# Altium PCB PCB1.PcbDoc (part 4 of 8)
Units mil, origin at the board's own origin, x right, y up, seen from the top; angles counter-clockwise.
Board outline 6000 x 4000 mil, 2 copper layers (Top Layer, Bottom Layer); 1253 components, 565 nets, 6549 pads, 0 vias.
Unrouted connection lines stored in the file: 1925.
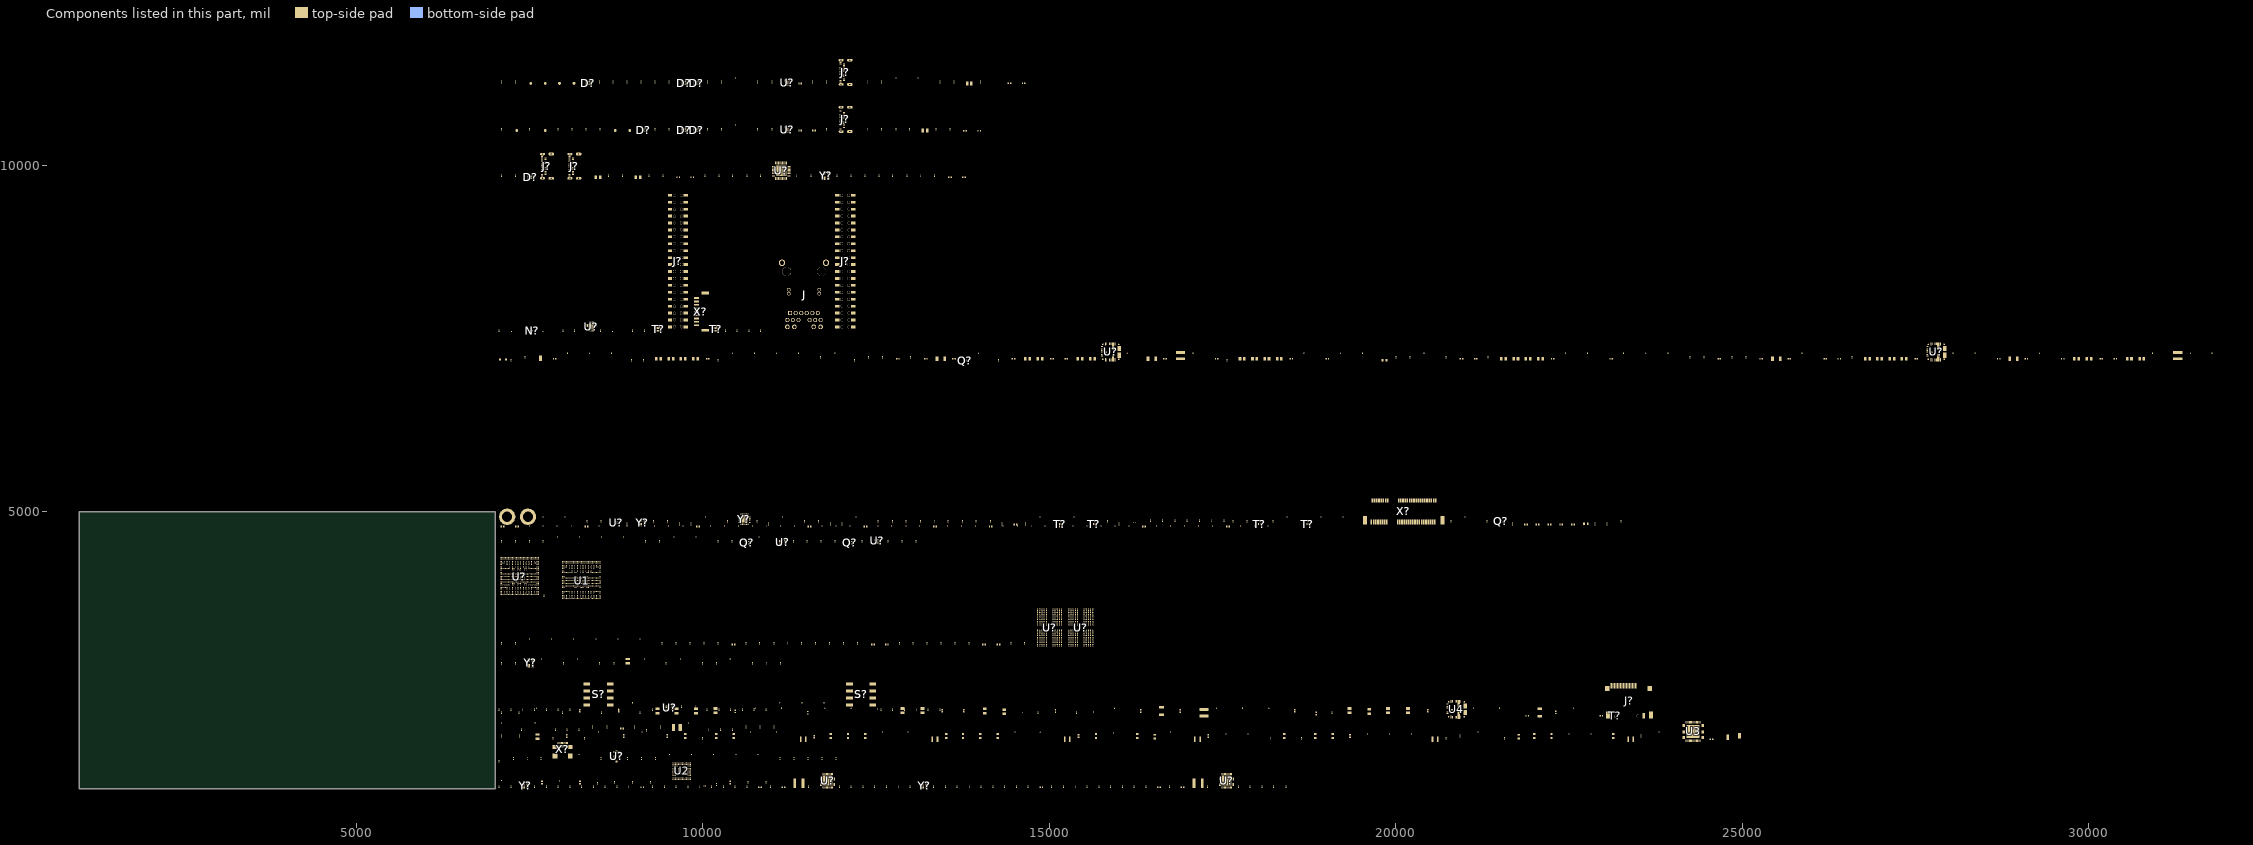
[diagram p3: the components of this part, seen from the top]

## Part data (continued)
C? C?: library part CMP-001-000292-14, "CAP", Manufacturer=Samsung, Manufacturer Part Number=GRM0335C1H470JA01D, Package=0201, Temperature characteristics=C0G, Tolerance=+/-5%, Voltage=50V, Alternative component=Allowed, ClassName=SMALL, Component Type=Capacitor, ComponentLink1Description=1_Datasheet, ComponentLink2Description="2_Product page", ComponentLink3Description=3_X-information, ComponentLink4Description=4_X-information, Creation date=20190101, HasBeenBuilt=TBD, Part Number=GRM0335C1H470JA01D, Sort order=302, Source=RLC_UN1Q.SchLib, System=RLC
C? C?: library part CMP-001-000271-14, "CAP", Manufacturer=Samsung, Manufacturer Part Number=GRM033R71E102KA01D, Package=0201, Temperature characteristics=X7R, Tolerance=+/-10%, Voltage=25V, Alternative component=Allowed, ClassName=SMALL, Component Type=Capacitor, ComponentLink1Description=1_Datasheet, ComponentLink2Description="2_Product page", ComponentLink3Description=3_X-information, ComponentLink4Description=4_X-information, Creation date=20190101, HasBeenBuilt=TBD, Part Number=GRM033R71E102KA01D, Sort order=302, System=RLC
C? C?: library part CMP-001-000419-13, "CAP_RF_MATCHING", Manufacturer=Murata, Manufacturer Part Number=GJM0335C1E100GB01D, Operating temperature range="-55 ... +125C", Package=0201, Temperature characteristics=C0G, Tolerance="+/- 2%", Voltage=25V, ClassName=SMALL, Component Type=Capacitor, ComponentLink1Description=1_Datasheet, ComponentLink2Description="2_Product page", ComponentLink3Description=3_X-information, ComponentLink4Description=4_X-information, Creation date=20200101, HasBeenBuilt=TBD, Part Number=GJM0335C1E100GB01D, Remark="RF matching, use part number", Sort order=202, System=RLC
D? D? D? D? D? D? D? D? D? D? D? D? D? D?: library part CMP-001-000916-4, "4-CH Low-Capacitance ESD Diode", Manufacturer="Texas Instruments", Operating temperature range="-40... +125 °C", Package=USON10, Component Type="ESD & EMI", ComponentLink1Description=1_Datasheet, ComponentLink1URL=http://www.ti.com/lit/gpn/tpd4e05u06, ComponentLink2Description="2_Product page", ComponentLink2URL=https://www.ti.com/product/TPD4E05U06, ComponentLink3Description=3_X-information, ComponentLink4Description=4_X-information, Creation date=20210927, Dimensions WxLxH=2.5x1.0x0.55, ECCN=EAR99, HasBeenBuilt=Saluki3_HW_RIB_2, Manufacturer Part Number=TPD4E05U06DQAR, Part Number=TPD4E05U06DQAR, RoHS=RoHS3, Sort order=405, Source=UUDET_KOMPONENTIT.SchLib, System=IC
J J: "MagJack 1000BASE-T", Package=None, Availability=Unavailable, MF="Bel Magnetic Solutions", MP=0826-1X1T-M1-F, Price=None, SnapEDA_Link=https://www.snapeda.com/parts/0826-1X1T-M1-F/Bel%20Magnetic%20Solutions/view-part/2753104/?ref=snap
J1 J2 J? J? J?: library part CMP-001-000157-12, Part Number="TP 1x2mm", ClassName=SMALL, Component Type="Test Point", ComponentLink1Description=1_Datasheet, ComponentLink2Description="2_Product page", ComponentLink3Description=3_X-information, ComponentLink4Description=4_X-information, Creation date=20200101, Design Item ID=TP_1x2mm, HasBeenBuilt=-, Sort order=-, Source=Conn_UN1Q.SchLib, System="Test Point"
J? J? J? J? J? J? J? J?: library part CMP-001-001438-8, "USB3.2 GEN1, Type C, Top mount, CH 1.50mm, Dual Row SMT, IPX8", Manufacturer=Amphenol, Manufacturer Part Number=12402082E512A, Operating temperature range="-40C to +85C", Part Number=124018612112A, ClassName=BIG, Component Type="Interface Connector", ComponentLink1Description=1_Datasheet, ComponentLink1URL=https://cdn.amphenol-cs.com/media/wysiwyg/files/documentation/datasheet/inputoutput/io_usb_type_c.pdf, ComponentLink2Description="2_Product page", ComponentLink2URL=https://www.amphenol-cs.com/product/124018612112a.html, ComponentLink3Description=3_X-information, ComponentLink4Description=4_X-information, Creation date=20250617, Design Item ID=USB_C_AMPHENOL_124018612112A, ECCN=EAR99, RoHS="RoHS 3", Sort order=101, System=Connector
J? J? J? J? J? J? J? J? J? J? J? J? J? J? J? J?: library part CMP-001-000153-12, "Testpoint 1.0mm", Part Number="TP 1mm", ClassName=SMALL, Component Type="Test Point", ComponentLink1Description=1_Datasheet, ComponentLink2Description="2_Product page", ComponentLink3Description=3_X-information, ComponentLink4Description=4_X-information, Creation date=20200101, Design Item ID=TP_1mm, HasBeenBuilt=-, Sort order=-, Source=Conn_UN1Q.SchLib, System="Test Point"
J? J? J? J? J?: Package=None, Availability=Unavailable, Price=None
  J? J? J? J?: MF="{'manufacturer': u'Sullins Connector Solutions'}", MP=NPTC202KFMS-RC
  J?: MF="{'manufacturer': u'W\xfcrth Elektronik'}", MP=693071020811
L1 L2 L3 L4 L5 L6: library part CMP-001-000947-11, "IND, Low DCR shielded", Manufacturer=TDK, Manufacturer Part Number=VLS252012HBX-R47M-1, Operating temperature range="-40 ... +105 °C", Package=2520, ClassName=BIG, Component Type=Inductor, ComponentLink1Description=1_Datasheet, ComponentLink1URL=https://product.tdk.com/en/system/files?file=dam/doc/product/inductor/inductor/smd/catalog/inductor_commercial_power_vls252012hbx-1_en.pdf, ComponentLink2Description="2_Product page", ComponentLink3Description=3_X-information, ComponentLink4Description=4_X-information, Creation date=09022024, Dimensions WxLxH="2.5 x 2.0 x 1.2mm", Part Number=VLS252012HBX-R47M-1, Sort order=348, Source=UUDET_KOMPONENTIT.SchLib, System=RLC
L7 L8 L9 L11 L12 L? L? L? L? L? L? L? L? L? L? L? L? R? R? R? R? R? R? R? R? R? R? R? R?: library part CMP-001-000738-12, "FERRITE", Current=3.1A, Manufacturer=Murata, Manufacturer Part Number=BLM15KD300SN1D, Operating temperature range="-55 ... +125C", Package=0402, Part Number=BLM15KD300SN1, Component Type=Ferrite, ComponentLink1Description=1_Datasheet, ComponentLink1URL=https://www.murata.com/en-us/products/productdetail.aspx?cate=luNoiseSupprFilteChipFerriBead&partno=BLM15KD300SN1%23, ComponentLink2Description="2_Product page", ComponentLink3Description=3_X-information, ComponentLink4Description=4_X-information, Creation date=20200304, Dimensions WxLxH=0.55mm, ECCN=EAR99, HasBeenBuilt=Saluki2, RoHS=RoHS3, Sort order=364, Source=Discrete_UN1Q.SchLib, System=Discrete